# Altium PCB Ladowarka.PcbDoc
Units mm, origin at the board's own origin, x right, y up, seen from the top; angles counter-clockwise.
Board outline 37.5 x 37.5 mm, 2 copper layers (Top Layer, Bottom Layer); 36 components, 23 nets, 105 pads, 22 vias.
Unrouted connection lines stored in the file: 22.
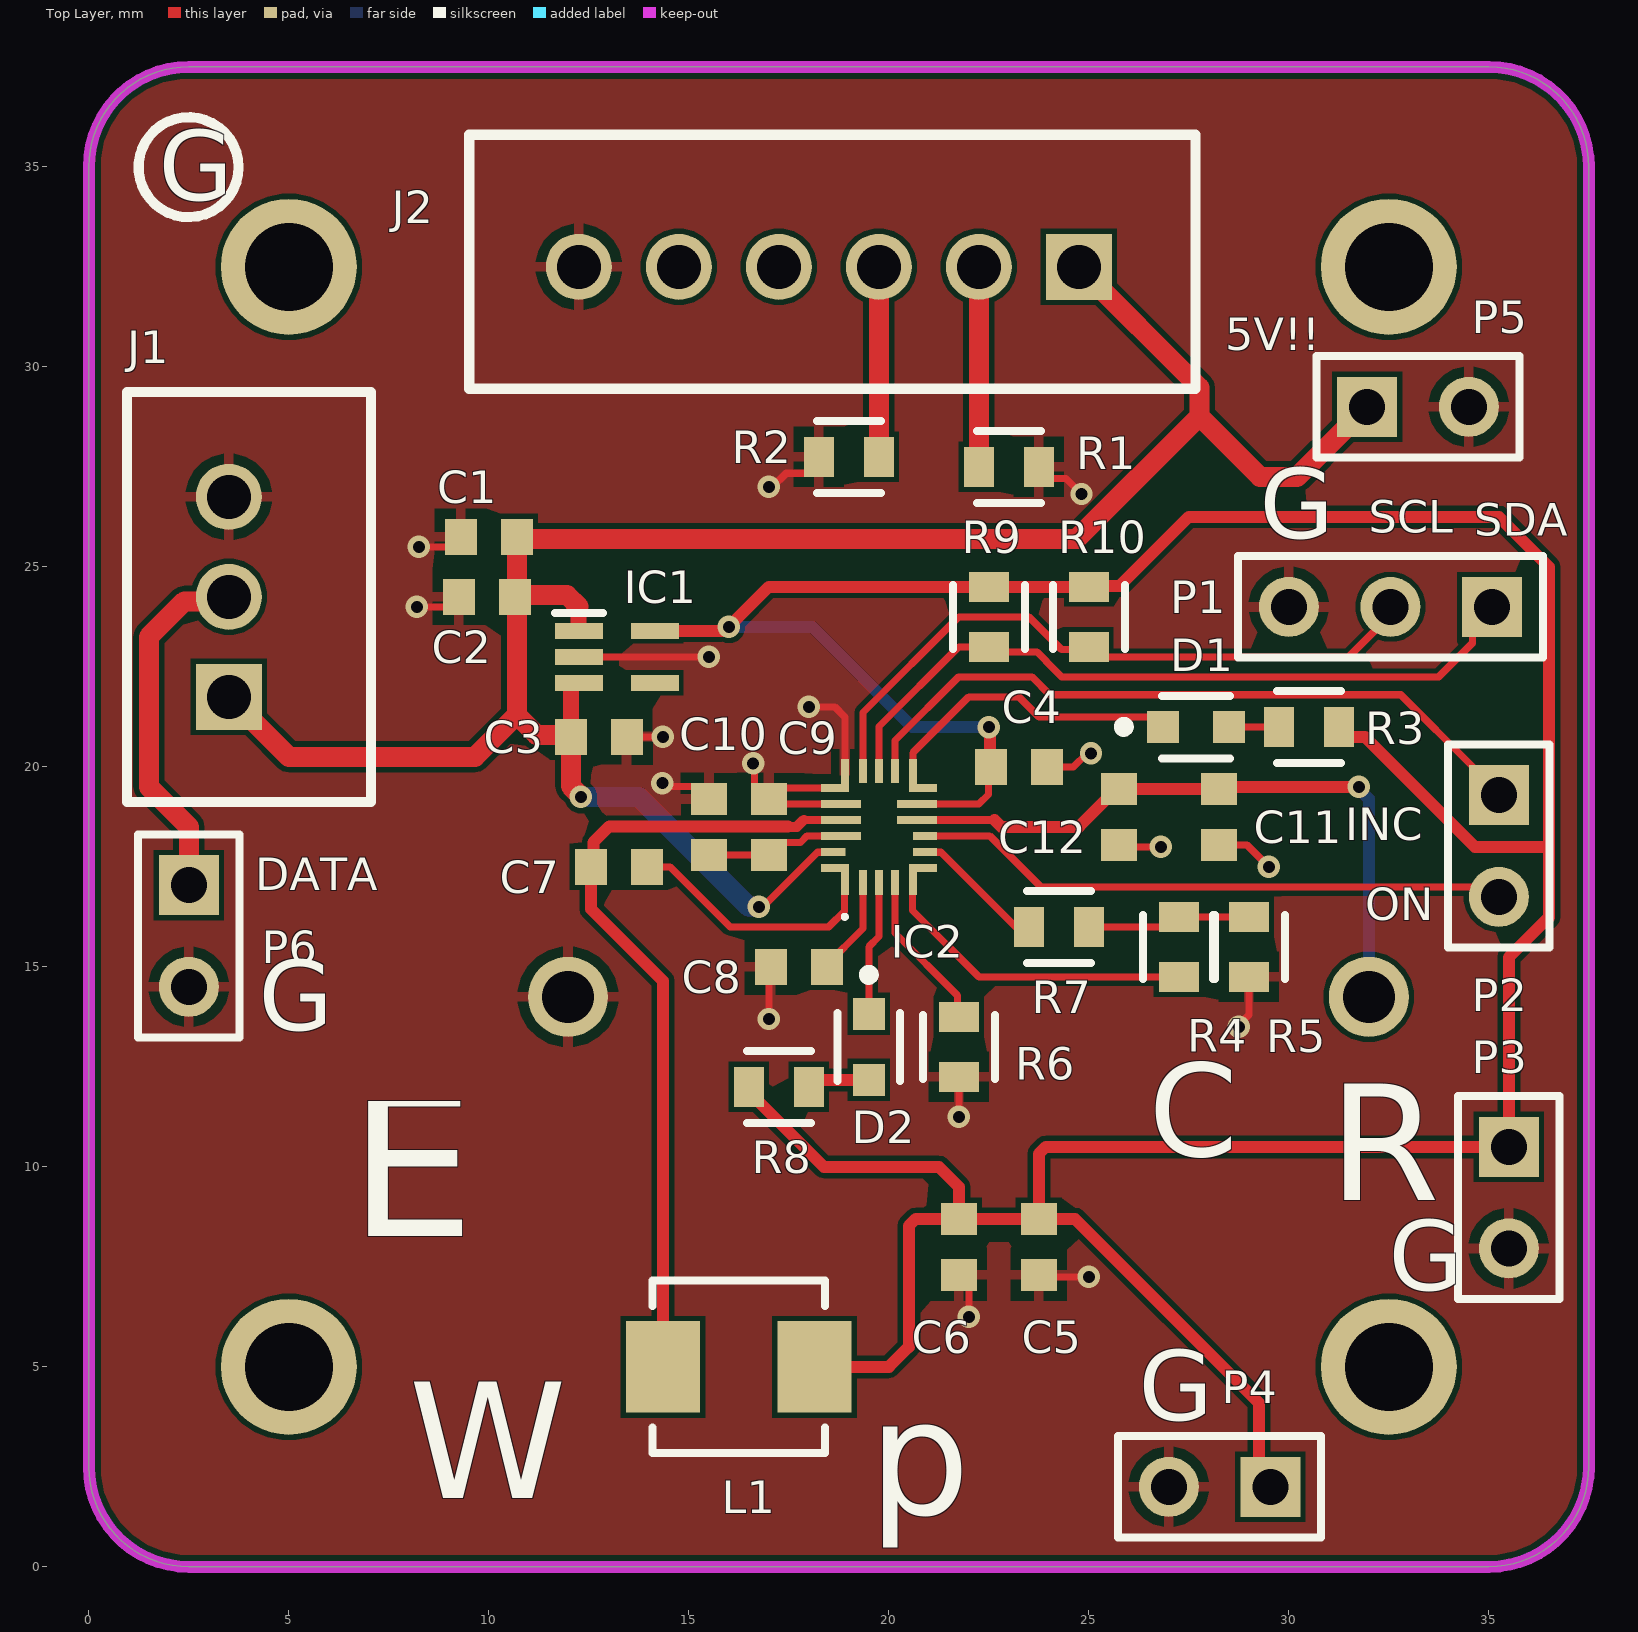
[diagram p0: Top Layer view]
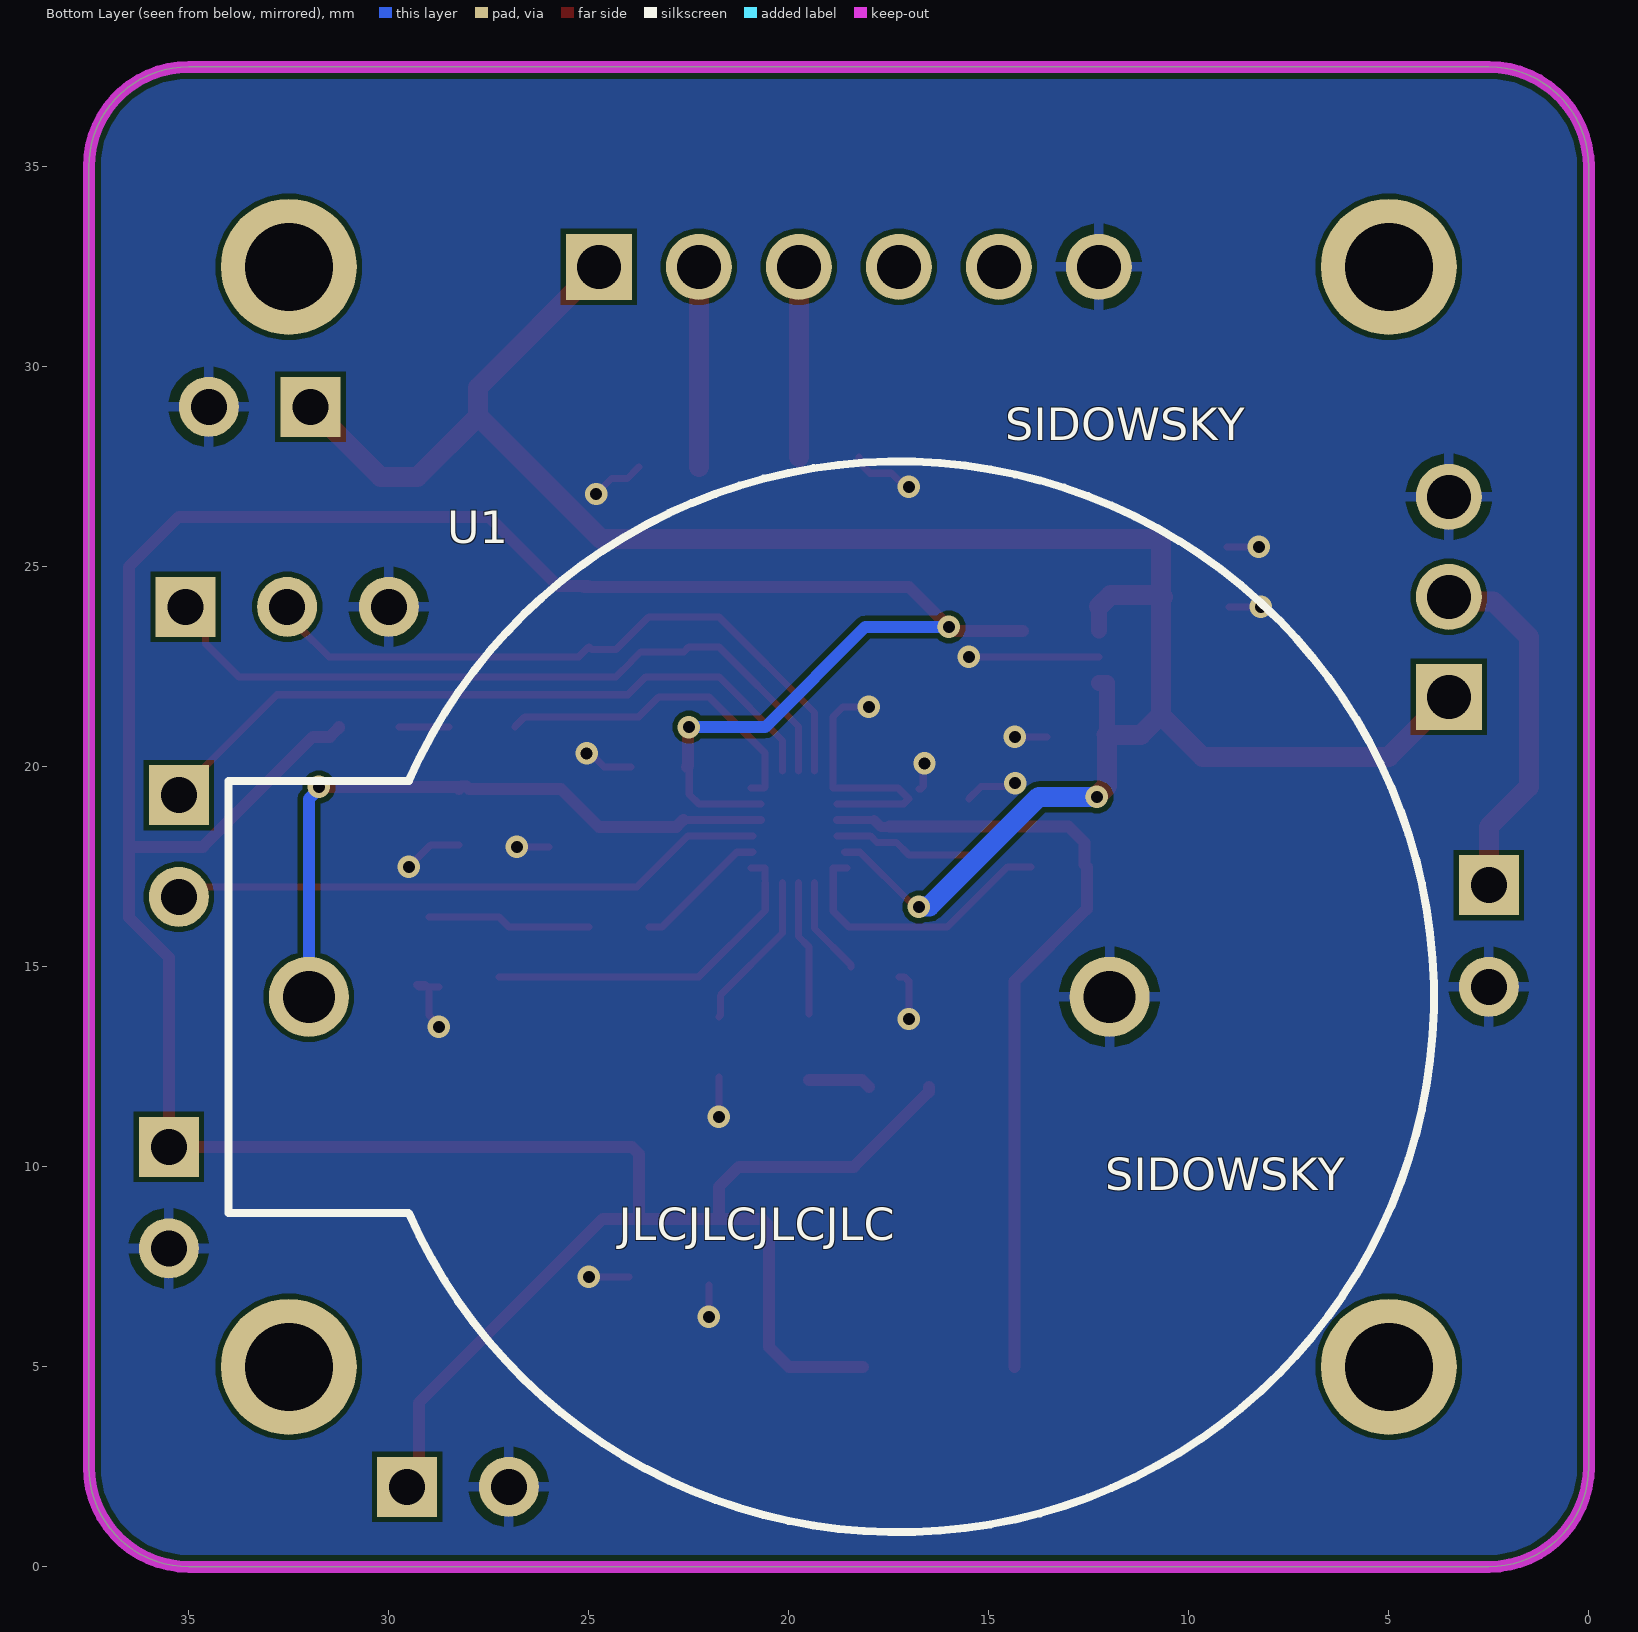
[diagram p1: Bottom Layer view, seen from below]

## Layer stack, top to bottom
Top Solder: solder mask 0.0102, Solder Resist, Dk 3.5
Top Layer: signal copper 0.0356
Dielectric 1: dielectric 0.32, FR-4, Dk 4.8
Bottom Layer: signal copper 0.0356
Bottom Solder: solder mask 0.0102, Solder Resist, Dk 3.5

## Board outline
2.5,0 cw(c2.5,2.5) 0,2.5 0,35 cw(c2.5,35) 2.5,37.5 35,37.5 cw(c35,35) 37.5,35 37.5,2.498 37.5,2.5 cw(c35,2.5) 35,0

## Design rules (kind name [scope] priority, off if disabled: settings)
AcuteAngle [All] p1: minimum=6.00000000000000E+0001 checktracksonly=TRUE
BoardOutlineClearance [All] p1: gap=0.3 ignorepadtopadclearanceinfootprint=FALSE
Clearance [All] p1: gap=0.127 ignorepadtopadclearanceinfootprint=TRUE
MinimumAnnularRing [All] p1: minimumring=0.13
MinimumSolderMaskSliver MinimumSolderMaskSliver_1 [All] p1: minsoldermaskwidth=0.08
PolygonConnect [All] p1: thpad.connectstyle=Relief thpad.reliefconductorwidth=0.254 thpad.reliefentries=4 thpad.polygonreliefangle="90 Angle" thpad.airgapwidth=0.254 smdpad.connectstyle=Relief smdpad.reliefconductorwidth=0.254 smdpad.reliefentries=4 smdpad.polygonreliefangle="90 Angle" smdpad.airgapwidth=0.254 via.connectstyle=Direct via.reliefconductorwidth=0.254 via.reliefentries=4 via.polygonreliefangle="90 Angle" via.airgapwidth=0.254
RoutingVias [All] p1: holewidth=0.3 width=0.56 viastyle="Through Hole" minholewidth=0.3 minwidth=0.56 maxholewidth=2 maxwidth=2.5
SilkToSilkClearance [All] p1: silktosilkclearance=0.15
SilkToSolderMaskClearance [IsPad] p1: minsilkscreentomaskgap=0.15 clearancetoexposedcopper=TRUE
SolderMaskExpansion [All] p1: expansion=0.05 istentingtop=FALSE
UnRoutedNet [All] p1: checkbadconnections=TRUE
Width [All] p1: maxlimit=0.5 minlimit=0.127 preferedwidth=0.178
26 further rules are at their usual default settings.

## Components (designator, comment, footprint, x,y, rotation, side; value= is the part's Value field where it differs from the comment)
C1 "100nF" 1608[0603] 10,25.75 r180 top
C2 "100nF" 1608[0603] 9.95,24.25 r180 top
C3 "100nF" 1608[0603] 12.75,20.75 r0 top
C4 "100nF" 1608[0603] 23.25,20 r0 top
C5 "100nF" 1608[0603] 23.75,8 r270 top
C6 "100nF" 1608[0603] 21.75,8 r270 top
C7 "100nF" 1608[0603] 13.25,17.5 r0 top
C8 "100nF" 1608[0603] 17.75,15 r180 top
C9 "100nF" 1608[0603] 17,18.5 r90 top
C10 "100nF" 1608[0603] 15.5,18.5 r90 top
C11 "100nF" 1608[0603] 28.25,18.75 r270 top
C12 "100nF" 1608[0603] 25.75,18.75 r270 top
D1 "SML-D12P8WT86C" FP-SML-D12-MFG 27.675,21 r0 top
D2 "SML-D12P8WT86C" FP-SML-D12-MFG 19.5,13 r270 top
IC1 "STLQ020C33R" SOT65P210X110-5N 13.2,22.75 r0 top
IC2 "BQ25622ERYKR" BQ25620RYKR 19.75,18.5 r90 top
J1 "LED_STRIP" SHDR3W64P0X250_1X3_990X575X700P 3.5,21.75 r270 top
J2 "XH-6A" SHDR6W64P0X250_1X6_1750X580X720P 24.75,32.5 r180 top
L1 "1uH 27mR 1616 package" FP-IHLP-1616BZ-FP_1_8545x-MFG 16.25,5 r180 top
P1 "I2C" HDR1X3 35.08,24 r180 top
P2 "I2C" HDR1X2 35.25,19.29 r270 top
P3 "VCC" HDR1X2 35.5,10.5 r270 top
P4 "VCC" HDR1X2 29.54,2 r180 top
P5 "VCC" HDR1X2 31.96,29 r0 top
P6 "DATA_LED" HDR1X2 2.5,17.04 r270 top
R1 "15k" FP-CRCW0603-e3-MFG 23,27.5 r180 top
R2 "15k" FP-CRCW0603-e3-MFG 19,27.75 r0 top
R3 "5.1k" FP-CRCW0603-e3-MFG 30.5,21 r0 top
R4 "10k" FP-CRCW0603-e3-MFG 27.25,15.5 r270 top
R5 "10k" FP-CRCW0603-e3-MFG 29,15.5 r90 top
R6 "5.1k" FP-CRCW0603-e3-MFG 21.75,13 r90 top
R7 "10k" FP-CRCW0603-e3-MFG 24.25,16 r180 top
R8 "5.1k" FP-CRCW0603-e3-MFG 17.25,12 r180 top
R9 "5.1k" FP-CRCW0603-e3-MFG 22.5,23.75 r90 top
R10 "5.1k" FP-CRCW0603-e3-MFG 25,23.75 r90 top
U1 "Baterry Holder" 1053 17.245,14.25 r0 bottom locked

## Footprints (in the part's own frame and the unit in brackets; to place one, negate y for a bottom-side part, rotate by r counter-clockwise, add the part's x,y. Pads: shape width x height; smd on the part's side, far side on the other; paste and mask are expansions set on the pad)
1053 [mm]
  round 2 hole 1.3: 1(-5.265,0) 2(14.755,0)
  silkscreen extent -13.37,-13.38 16.76,13.38, body extent -13.37,-13.37 15.97,13.38, height 9.52
1608[0603] [mm] "Chip Capacitor, Body 1.6x0.8mm, IPC High Density"
  rect 0.8x0.9 smd: 1(-0.7,0) 2(0.7,0)
  body extent -0.87,-0.48 0.87,0.48, height 1.3
BQ25620RYKR [mm]
  rect 0.775x0.2 smd: 1(-1.313,0.85) 5(-1.313,-0.85)
  rect 0.625x0.2 smd: 2(-1.388,0.393) 3(-1.388,-0.007) 4(-1.388,-0.407)
  rect 0.2x0.6 smd: 6(-0.625,-1.15) 7(-0.225,-1.15)
  rect 0.2x1 smd: 8(0.175,-0.95) 9(0.575,-0.95) 15(0.575,0.95) 16(0.175,0.95) 17(-0.225,0.95)
  rect 0.825x0.2 smd: 10(1.288,-0.85) 14(1.288,0.85)
  rect 0.6x0.2 smd: 11(1.4,-0.407) 12(1.4,-0.007) 13(1.4,0.393)
  rect 0.2x0.619 smd: 18(-0.625,1.141)
  rect 0.2x0.5 smd: 19(-1.025,1.2) 20(-1.025,-1.2) 21(0.975,-1.2) 22(0.975,1.2)
  silkscreen extent -2.3,0.8 -2.2,0.9, body extent -1.5,-1.25 1.5,1.25, height 0.9
FP-CRCW0603-e3-MFG [mm]
  rect 0.75x1 smd paste+0 mask+0: 1(-0.75,0) 2(0.75,0)
  silkscreen extent -0.8,-0.9 0.8,0.9, body extent -1.22,-0.6 1.22,0.6, height 0.25
FP-IHLP-1616BZ-FP_1_8545x-MFG [mil]
  rect 73.01x90 smd paste+0 mask+0: 1(-74.5,0) 2(74.5,0)
  silkscreen extent -85,-85 85,85, body extent -115,-89 115,89, height 10
FP-SML-D12-MFG [mm]
  rect 0.8x0.8 smd paste+0 mask+0: 1(-0.825,0) 2(0.825,0)
  silkscreen extent -1.92,-0.79 0.85,0.77, body extent -1.33,-0.55 1.33,0.55, height 0.25
HDR1X2 [mm] "Connector; Header; 2 Position"
  rect 1.5x1.5 hole 0.9: 1(0,0)
  round 1.5 hole 0.9: 2(2.54,0)
  silkscreen extent -1.27,-1.27 3.81,1.27
HDR1X3 [mm] "Connector; Header; 3 Position"
  rect 1.5x1.5 hole 0.9: 1(0,0)
  round 1.5 hole 0.9: 2(2.54,0) 3(5.08,0)
  silkscreen extent -1.27,-1.27 6.35,1.27
SHDR3W64P0X250_1X3_990X575X700P [mm]
  rect 1.65x1.65 hole 1.1: 1(0,0)
  round 1.65 hole 1.1: 2(-2.5,0) 3(-5,0)
  silkscreen extent -7.62,-2.54 2.63,3.56, body extent -7.45,-2.88 2.45,2.88, height 7
SHDR6W64P0X250_1X6_1750X580X720P [mm]
  rect 1.65x1.65 hole 1.1: 1(0,0)
  round 1.65 hole 1.1: 2(2.5,0) 3(5,0) 4(7.5,0) 5(10,0) 6(12.5,0)
  silkscreen extent -2.92,-3.3 15.24,3.05, body extent -2.5,-2.9 15,2.9, height 7.2
SOT65P210X110-5N [mm]
  rect 1.2x0.4 smd: 1(-0.95,0.65) 2(-0.95,0) 3(-0.95,-0.65) 4(0.95,-0.65) 5(0.95,0.65)
  silkscreen extent -1.55,1.1 -0.35,1.1, body extent -1.05,-1 1.05,1, height 1.1

## Part data
C1 C2 C3 C4 C5 C6 C7 C8 C9 C10 C11 C12: library part "Cap Semi", "Capacitor (Semiconductor SIM Model)", LatestRevisionDate=29-May-2009, LatestRevisionNote="IPC-7351 Footprint Added.", PackageDescription="Chip Capacitor", PackageReference=C1206, Published=8-Jun-2000, Publisher="Altium Limited"
D1 D2: library part CMP-08952-000001-1, "LED GREEN 1608 SMD", Colour=Green, Forward Current=20mA, Forward Voltage=2.2V, Manufacturer=Rohm, Package=SML-D12, Power Dissipation=54mW, Reverse Voltage=5V, Temperature="-40°C to +85°C", Temperature Range High=+85°C, Temperature Range Low=-40°C, Automotive=Yes, Automotive Grade="Grade 3", Category=Diode, ComponentLink2Description=Datasheet, ComponentLink2URL=https://www.rohm.com/datasheet/SML-D12P8W(C)/sml-d12x8(c)-e, Device Class L1=Optoelectronics, Device Class L2=LEDs, Device Class L3=unset, Digikey Description="LED GREEN 1608 SMD", Height=0.65mm, Lead Free=Yes, Led Orientation="Top View", Luminous Intensity=6.3mcd, Manufacturer Part Number=SML-D12P8WT86C, Mouser Description="LED Uni-Color Green Automotive 2-Pin Chip 0603(1608Metric) T/R", Octopart=https://octopart.com/sml-d12p8wt86c-rohm-77740213, RoHS=TRUE, Wavelength=560nm
IC1: "Integrated Circuit", Manufacturer_Name=STMicroelectronics, Mouser Part Number=511-STLQ020C33R, Arrow Part Number=STLQ020C33R, Arrow Price/Stock=https://www.arrow.com/en/products/stlq020c33r/stmicroelectronics?region=nac, Datasheet Link=https://www.st.com/resource/en/datasheet/stlq020.pdf, Height=1.1mm, Manufacturer_Part_Number=STLQ020C33R, Mouser Price/Stock=https://www.mouser.co.uk/ProductDetail/STMicroelectronics/STLQ020C33R?qs=%252B6g0mu59x7LMe2XkJbXkFw%3D%3D
IC2: "Integrated Circuit", Arrow Part Number=BQ25620RYKR, Manufacturer_Name="Texas Instruments", Mouser Part Number=595-BQ25620RYKR, Arrow Price/Stock=https://www.arrow.com/en/products/bq25620rykr/texas-instruments?region=nac, Datasheet Link=https://www.ti.com/lit/ds/symlink/bq25622e.pdf, Height=0.8mm, Manufacturer_Part_Number=BQ25620RYKR, Mouser Price/Stock=https://www.mouser.co.uk/ProductDetail/Texas-Instruments/BQ25620RYKR?qs=T%252BzbugeAwji%252BU45Wuf4i%252Bw%3D%3D
J1: library part B3B-XH-A, "Connector", Manufacturer_Name="JST (JAPAN SOLDERLESS TERMINALS)", Datasheet Link=http://www.jst-mfg.com/product/pdf/eng/eXH.pdf, Height=7mm, Manufacturer_Part_Number=B3B-XH-A
J2: "Connector", Manufacturer_Name="BOOMELE(Boom Precision Elec)", Datasheet Link=https://datasheet.lcsc.com/szlcsc/1810221832_BOOMELE-Boom-Precision-Elec-XH-6A_C5663.pdf, Height=7.2mm, Manufacturer_Part_Number=XH-6A
L1: library part CMP-02424-000223-1, "Fixed Inductors Commercial Low DCR Series SMT 1uH 4.5A 27mΩ 20%", Case Code (Imperial)=1616, Case Code (Metric)=4040, Current Rating=4.5A, DC Resistance (DCR)=27mR, Inductance=1uH, Inductance Tolerance=20%, Max Operating Temperature=125°C, Min Operating Temperature=-55°C, Package Quantity=4000, Saturation Current=5A, Self Resonant Frequency=64MHz, Test Frequency=100kHz, Case/Package=1616, Contact Plating=Tin, Core Material=Ferrite, Depth=4.31mm, Height=2mm, Height - Seated (Max)=0.079inch, Lead Free="Lead Free", Length=4.7mm, Max DC Current=4.5A, Military Standard=Not, Mount="Surface Mount", Number of Pins=1616, Packaging="Tape and Reel", Radiation Hardening=No, RMS Current (Irms)=4.5A, Shielding=Shielded, Termination=SMD/SMT, Tolerance=20%, Width=0.16inch
P1: library part "Header 3", "Header, 3-Pin", LatestRevisionDate=17-Jul-2002, LatestRevisionNote="Re-released for DXP Platform.", Publisher="Altium Limited"
P2 P3 P4 P5 P6: library part "Header 2", "Header, 2-Pin", LatestRevisionDate=17-Jul-2002, LatestRevisionNote="Re-released for DXP Platform.", Publisher="Altium Limited"
R1 R2 R3 R4 R5 R6 R7 R8 R9 R10: library part CMP-2000-03525-2, "RES Thick Film, 10kΩ, 1%, 0.1W, 100ppm/°C, 0603", Case Code (Imperial)=0603, Case Code (Metric)=1608, Max Operating Temperature=155°C, Max Power Dissipation=100mW, Min Operating Temperature=-55°C, Package Quantity=10, Resistance=66.5kR, Temperature Coefficient=100ppm/°C, Tolerance=1%, Voltage Rating=75V, Case/Package=0603, Composition="Thick Film", Contact Plating=Tin, Depth=0.85mm, Features="Automotive AEC-Q200", Height=0.45mm, Length=1.55mm, Military Standard=Not, Number of Pins=2, Number of Terminations=2, Packaging="Tape and Reel", Power Rating=100mW, Radiation Hardening=No, Termination=SMD/SMT, Weight=7.1E-05oz, Width=0.85mm, Working Voltage=75V
U1: library part 1053, "Undefined or Miscellaneous", Manufacturer_Name="Keystone Electronics", Mouser Part Number=534-1053-BH, Arrow Part Number=1053, Arrow Price/Stock=https://www.arrow.com/en/products/1053/keystone-electronics, Datasheet Link=http://www.keyelco.com/product-pdf.cfm?p=751, Manufacturer_Part_Number=1053, Mouser Price/Stock=https://www.mouser.co.uk/ProductDetail/Keystone-Electronics/1053?qs=%2F7TOpeL5Mz4zfgvqwo9sng%3D%3D

## Free pads (board coordinates)
  round 3.4 hole 2.2: 0(5,5) 0(5,32.5) 0(32.5,5) 0(32.5,32.5)

## Via types
v1: diameter 0.56, hole 0.3, Top Layer to Bottom Layer, tented both sides, 22 vias

## Nets (pads, with @x,y where several pads share a name; then routed paths per layer and width w, separated by ;. In a path a pad name is that pad's centre, name@x,y a point inside that pad or via, vN(x,y) a via of type N, cw(c..) or ccw(c..) an arc to the next point about the centre after c; other vN are vias at no path point)
+5: C1.1 C2.1 C3.1 IC1.1 IC1.3 IC2.18 J1.1 J2.1 P5.1 | length 56.5
  Top Layer w0.178: v1(16.75,16.5) 16.853,16.5 17.009,16.656 17.012,16.656 18.219,17.864 18.598,17.864 IC2.18
  Top Layer w0.4: C3.1@12.102,20.802 12.05,20.854 12.05,22.1 IC1.3 ; IC1.1@12.248,23.402 12.248,24.002
  Top Layer w0.5: J1.1 5,20.25 9.657,20.25 10.7,21.293 ; C2.1 10.7,24.2 10.7,21.293 ; C1.1 C1.1@10.7,25.7 ; 12.248,24.002 11.955,24.295 10.695,24.295 10.7,24.3 C1.1@10.7,25.7 ; v1(12.3,19.25) 12.3,19.266 12.05,19.516 C3.1 12,20.8 11.193,20.8 10.7,21.293 ; J2.1 27.766,29.484 27.766,28.766 ; P5.1 30.21,27.25 29.796,27.25 29.281,27.25 27.766,28.766 ; C1.1@10.7,25.7 24.7,25.7 27.766,28.766
  Bottom Layer w0.5: v1(12.3,19.25) 13.75,19.25 16.489,16.511 16.739,16.511 v1(16.75,16.5)
BAT_INC_OC: IC2.11 P2.1 | length 17.8
  Top Layer w0.178: IC2.11 20.157,20.66 21.747,22.25 23.576,22.25 24.025,21.801 32.799,21.801 34.589,20.011 34.589,19.951 P2.1
BAT_ON: IC2.7 P2.2 | length 15
  Top Layer w0.178: IC2.7 22.521,18.275 23.796,17 35,17 P2.2
D+: J2.2 R1.2 | length 4.7
  Top Layer w0.5: R1.2 J2.2@22.25,32.229
D-: J2.3 R2.2 | length 4.8
  Top Layer w0.5: R2.2 J2.3
DATA: J1.2 P6.1 | length 9
  Top Layer w0.5: P6.1 2.5,18.5 1.5,19.5 1.5,23.25 2.386,24.136 3.386,24.136 J1.2
GND: C1.2 C2.2 C3.2 C4.2 C5.2 C6.2 C8.2 C9.2 C10.2 C11.2 C12.2 IC1.2 IC2.14 IC2.15 IC2.22 J1.3 J2.6 P1.3 P3.2 P4.2 P5.2 P6.2 R1.1 R2.1 R5.1 R6.1 U1.1 | length 26.9
  Top Layer w0.178: v1(8.2,24) C2.2@9,24 ; v1(8.25,25.5) C1.2@9.05,25.5 ; IC1.2 v1(15.5,22.75) ; C3.2@13.55,20.75 v1(14.35,20.75) ; v1(14.34,19.59) 14.413,19.516 14.516,19.516 14.522,19.511 15.189,19.511 C10.2 ; v1(16.609,20.089) 16.639,20.059 16.639,19.511 16.7,19.45 C9.2@16.75,19.45 ; v1(17,13.696) 17,14.639 17.111,14.75 C8.2@17.25,14.75 ; v1(17,27) 17.096,27 17.435,27.339 17.964,27.339 18.25,27.625 R2.1 ; v1(18,21.5) 18.646,21.5 18.9,21.246 IC2.14 18.9,19.486 18.889,19.475 IC2.22 17.275,19.475 C9.2 17.125,19.075 IC2.15 ; v1(21.75,11.25) R6.1 ; v1(22,6.25) C6.2@22,7.05 ; R1.1 23.75,27.494 24.036,27.208 24.431,27.208 v1(24.818,26.822) ; C4.2 24.617,20 24.954,20.337 v1(25.054,20.337) ; C5.2@24,7.25 v1(25,7.25) ; C12.2@26,18 v1(26.8,18) ; C11.2 28.95,18.05 v1(29.5,17.5) ; v1(28.75,13.5) 28.75,13.545 29,13.795 29,14.464 R5.1@29.036,14.5 ; R5.1@28.75,14.5 R5.1@29.036,14.5 ; R5.1@29.036,14.5 29.099,14.563 29.313,14.563 29.25,14.5 R5.1@29.036,14.5
NetC7_1: C7.1 IC2.16 L1.2 | length 20.3
  Top Layer w0.2: 17.875,18.675 IC2.16
  Top Layer w0.25: 17.482,18.511 17.493,18.5 17.7,18.5 17.875,18.675
  Top Layer w0.3: L1.2 14.358,14.642 12.55,16.45 C7.1 12.613,17.563 12.613,18.113 13.011,18.511 17.482,18.511
NetC7_2: C7.2 IC2.1 IC2.19 | length 7.1
  Top Layer w0.178: C7.2 14.532,17.5 16.032,16 18.5,16 18.889,16.389 18.889,17.475 IC2.19
NetC8_1: C8.1 IC2.2 | length 2.5
  Top Layer w0.178: C8.1 18.45,15.05 19.357,15.957 IC2.2
NetC9_1: C9.1 C10.1 IC2.17 | length 3.5
  Top Layer w0.178: C10.1 C9.1 17.311,18.111 17.793,18.111 17.957,18.275 IC2.17
NetD1_1: D1.1 IC2.10 IC2.21 | length 8.4
  Top Layer w0.178: IC2.21 20.611,19.475 20.6,19.486 20.6,20.35 22,21.75 23.25,21.75 23.75,21.25 26.6,21.25 D1.1
NetD1_2: D1.2 R3.1 | length 1.3
  Top Layer w0.178: D1.2 R3.1
NetD2_1: D2.1 IC2.3 | length 3.4
  Top Layer w0.178: D2.1 19.5,15.5 19.757,15.757 IC2.3
NetD2_2: D2.2 R8.1 | length 1.6
  Top Layer w0.3: R8.1 18.175,12.175 D2.2
NetIC2_4: IC2.4 R6.2 | length 4
  Top Layer w0.178: IC2.4 20.157,15.843 21.712,14.288 21.712,13.788 R6.2
NetIC2_5: IC2.5 IC2.20 R4.2 | length 8.7
  Top Layer w0.178: IC2.5@20.589,17.111 20.589,16.411 22.25,14.75 R4.2 ; IC2.5 20.6,17.464 20.611,17.475 IC2.20
NetIC2_6: IC2.6 R7.2 | length 3.4
  Top Layer w0.178: IC2.6 20.911,17.864 21.302,17.864 23.166,16 R7.2
NetR4_1: R4.1 R5.2 R7.1 | length 4.1
  Top Layer w0.178: R7.1 27,16 R4.1 R5.2
SCL: IC2.13 P1.2 R10.1 | length 16.7
  Top Layer w0.178: IC2.13 19.357,21.357 21.75,23.75 23.5,23.75 24.313,22.937 24.937,22.937 R10.1 25.25,22.75 31.499,22.75 32.287,23.538 32.287,23.747 P1.2
SDA: IC2.12 P1.1 R9.1 | length 18.5
  Top Layer w0.178: IC2.12 19.757,21.007 21.75,23 R9.1 22.626,22.874 23.709,22.874 23.935,22.648 23.935,22.635 24.32,22.25 33.75,22.25 34.587,23.087 34.587,23.507 P1.1
VBAT: C4.1 C5.1 C6.1 IC1.5 IC2.9 L1.1 P3.1 P4.1 R3.2 R8.2 R9.2 R10.2 | length 95.9
  Top Layer w0.178: IC2.9 21.802,19.075 22.252,19.075 22.489,19.312 22.489,19.989 C4.1@22.525,20.025
  Top Layer w0.3: IC1.5 15.83,23.4 15.93,23.5 v1(16,23.5) 17,24.5 R9.2 R10.2@25.125,24.5 ; R8.2 16.5,11.875 18.375,10 21.25,10 21.75,9.5 C6.1 ; L1.1 20,5 20.5,5.5 20.5,8.524 20.676,8.7 C6.1 ; v1(22.5,20.993) 22.525,20.968 22.525,20.025 C4.1 ; R10.2 25.024,24.524 25.774,24.524 27.5,26.25 35.25,26.25 36.5,25 36.5,18 ; P4.1 29.25,2.29 29.25,4.1 24.65,8.7 C5.1 ; R3.2 31.25,20.974 31.475,20.749 31.899,20.749 34.648,18 36.5,18 ; C6.1 C5.1 ; C5.1 23.75,10.324 23.926,10.5 P3.1 35.5,15.239 36.5,16.239 36.5,18
  Bottom Layer w0.3: v1(16,23.5) 18.086,23.5 20.593,20.993 v1(22.5,20.993)
VBAT_RAW: C11.1 C12.1 IC2.8 U1.2 | length 16.9
  Top Layer w0.2: IC2.8 22.639,18.675
  Top Layer w0.3: 22.639,18.675 22.814,18.5 24.75,18.5 25.7,19.45 C12.1 28,19.45 28.063,19.513 28.188,19.513 C11.1 28.3,19.5 v1(31.75,19.5)
  Bottom Layer w0.3: v1(31.75,19.5) 31.75,19.444 32,19.194 U1.2
pads on no net: IC1.4 J2.4 J2.5

## Polygon pours and split planes (outlines as drawn)
GND on Bottom Layer "GNDTOP" (solid, pour order 0): 0,0 0,37.5 37.5,37.5 37.5,-0.25
GND on Top Layer "GNDTOP" (solid, pour order 4): 0,0 0,37.5 37.5,37.5 37.5,-0.25

## Keep-outs
Keep-Out Layer:
  lines w0.1: 0,2.5 ccw(c2.5,2.5) 2.5,0 35,0 ccw(c35,2.5) 37.5,2.5 37.5,2.498 37.5,35 ccw(c35,35) 35,37.5 2.5,37.5 ccw(c2.5,35) 0,35 0,2.5
  lines w0.15: 0,2.5 ccw(c2.5,2.5) 2.5,0 35,0 ccw(c35,2.5) 37.5,2.5 37.5,2.498 37.5,35 ccw(c35,35) 35,37.5 2.5,37.5 ccw(c2.5,35) 0,35 0,2.5
  lines w0.3: 0,2.5 ccw(c2.5,2.5) 2.5,0 35,0 ccw(c35,2.5) 37.5,2.5 37.5,2.498 37.5,35 ccw(c35,35) 35,37.5 2.5,37.5 ccw(c2.5,35) 0,35 0,2.5

## Silkscreen, mask and mechanical layers (free items; w line width, h text height)
Top Overlay:
  circle w0.254: c2.494,34.991 r1.25
  text "G" at 1.75,33.592 h3
  text "5V!!" at 28.41,30.41 h0.81
  text "SCL" at 31.992,25.846 h0.81
  text "SDA" at 34.641,25.779 h0.81
  text "G" at 29.272,25.138 h3
  text "INC" at 31.41,18.16 h0.81
  text "DATA" at 4.16,16.91 h0.81
  text "ON" at 31.91,16.16 h0.81
  text "G" at 4.25,12.842 h3
  text "C" at 26.5,9.5 h4
  text "R" at 31,8.204 h5
  text "E" at 6.5,6.75 h8
  text "G" at 32.5,6.342 h3
  text "G" at 26.25,3.092 h3
  text "W" at 8,0.75 h5
  text "p" at 19.5,0.357 h5
Bottom Overlay:
  text "SIDOWSKY" at 14.59,28.16 h0.81
  text "SIDOWSKY" at 12.09,9.41 h0.81
  text "JLCJLCJLCJLC" at 24.249,8.161 h0.81